# Altium PCB Sensor_Box_RGB_CTRL.PCBDOC (part 1 of 2)
Units mil, origin at the board's own origin, x right, y up, seen from the top; angles counter-clockwise.
Board outline 895.86 x 2876.17 mil, 2 copper layers (Top, Bot), stack 61.855 mil thick; 64 components, 53 nets, 223 pads, 84 vias.
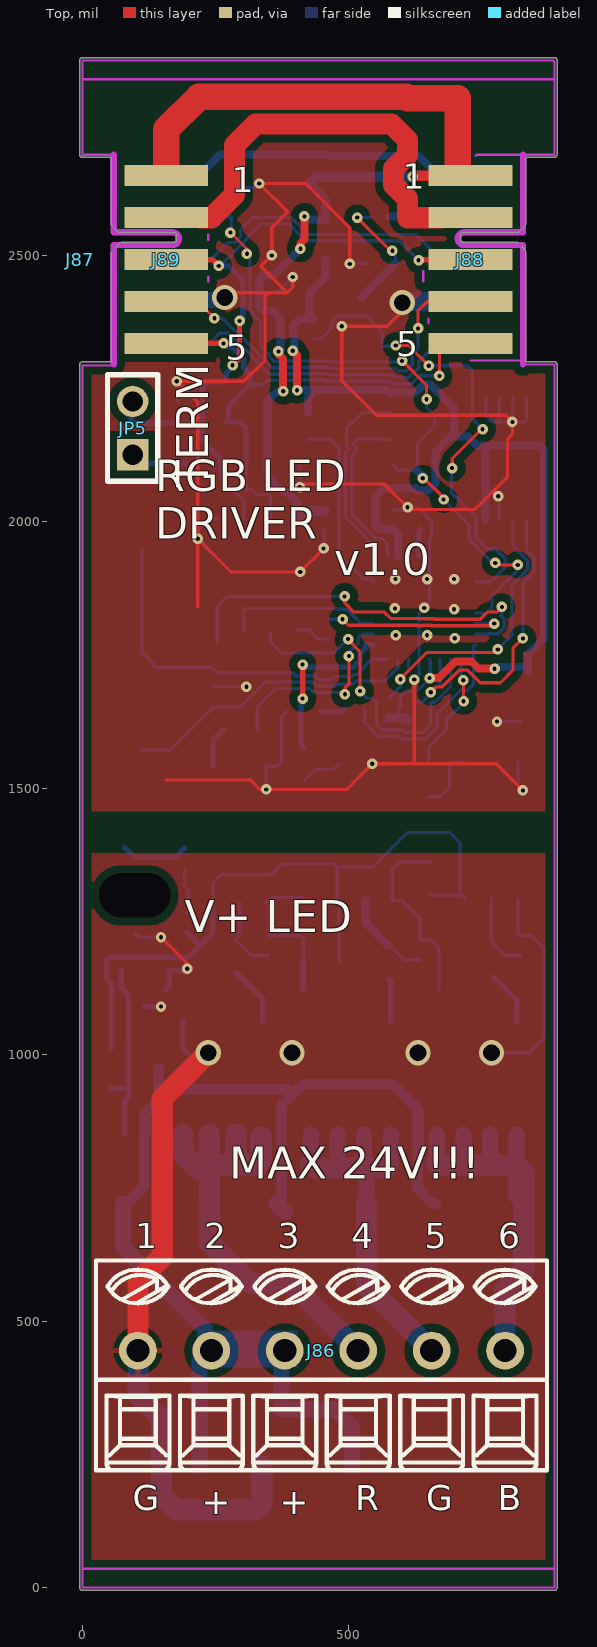
[diagram p0: Top view]
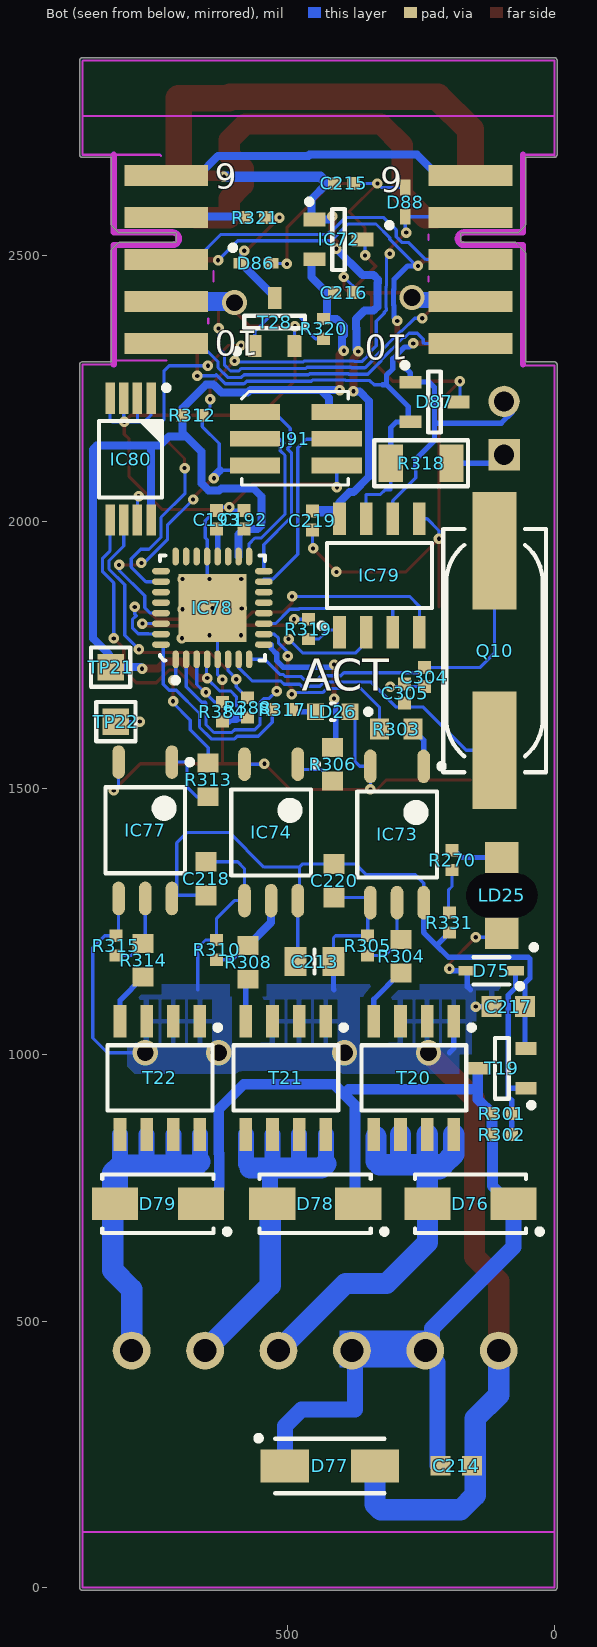
[diagram p1: Bot view, seen from below]
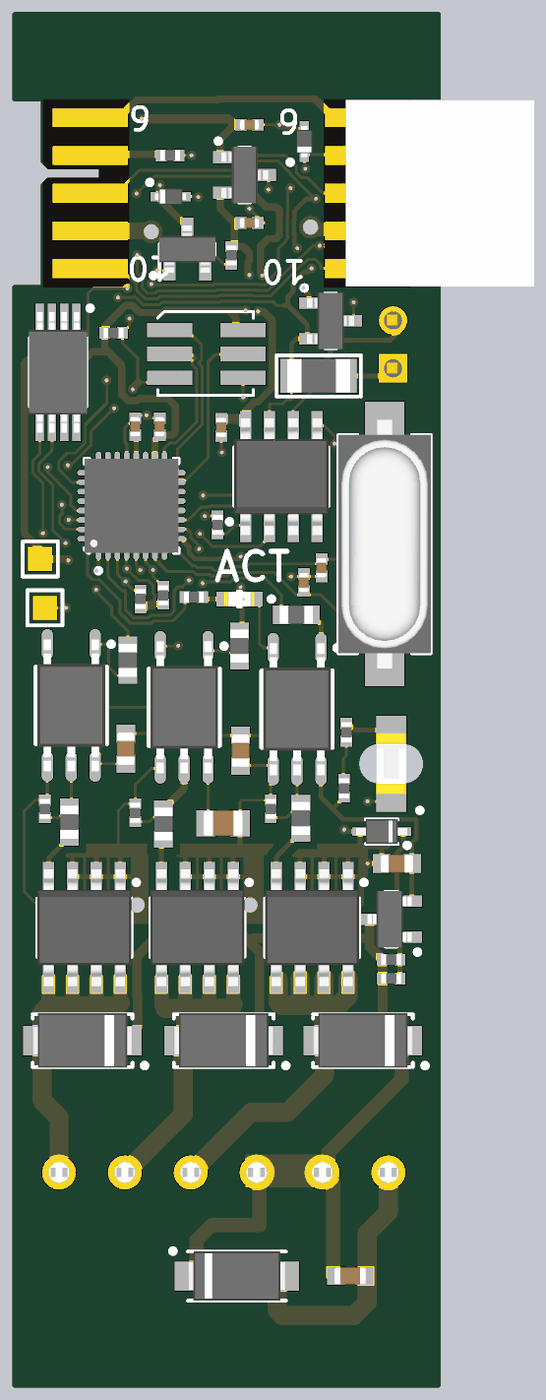
[diagram p2: 3D render of the assembled board from below, using the file's embedded part models]

## Layer stack, top to bottom
TopSolder: solder mask 0.4, Solder Resist, Dk 3.5
Top: signal copper 1.4
Dielectric1: core 59.0551, FR-4, Dk 4.8
Bot: signal copper 1.4
BottomSolder: solder mask 0.4, Solder Resist, Dk 3.5

## Board outline
-5.02,0 -5.02,2295.28 cw(c0,2295.28) 0,2300.29 54.04,2300.29 54.04,2503.94 cw(c59.06,2503.94) 55.53,2507.5 55.51,2507.48 71.26,2523.23 71.24,2523.21 cw(c74.8,2519.68) 74.8,2524.7 176.09,2524.7 176.09,2542.23 70.87,2542.23 cw(c70.87,2547.24) 67.3,2543.71 67.32,2543.7 55.51,2555.51 55.53,2555.49 cw(c59.06,2559.06) 54.04,2559.06 54.04,2683.96 0,2683.96 cw(c0,2688.98) -5.02,2688.98 -5.02,2866.14 ccw(c0,2866.14) -5.02,2866.14 cw(c0,2866.14) 0,2871.16 885.83,2871.16 cw(c885.83,2866.14) 890.84,2866.14 890.84,2688.98 cw(c885.83,2688.98) 885.83,2683.96 831.79,2683.96 831.79,2559.06 cw(c826.77,2559.06) 830.3,2555.49 830.32,2555.51 818.51,2543.7 818.52,2543.72 cw(c814.96,2547.24) 814.96,2542.23 709.74,2542.23 709.74,2524.7 814.96,2524.7 cw(c814.96,2519.69) 818.52,2523.21 818.51,2523.23 830.32,2511.42 830.3,2511.44 cw(c826.77,2507.87) 831.79,2507.87 831.79,2300.29 885.83,2300.29 cw(c885.83,2295.28) 890.84,2295.28 890.84,0 cw(c885.83,0) 885.83,-5.01 0.04,-5.01 cw(c0,0)

## Design rules (kind name [scope] priority, off if disabled: settings)
Clearance Clearance_DIFF [(InDifferentialPairClass('All Differential Pairs'))] p1: gap=5 ignorepadtopadclearanceinfootprint=FALSE except(0: Arc-Hole Track-Hole SMDPad-Hole THPad-Hole Via-Hole Fill-Hole Poly-Hole Region-Hole Text-Hole; 10: Arc-Poly Track-Poly SMDPad-Poly THPad-Poly Via-Poly Fill-Poly Poly-Poly Poly-Region Poly-Text)
Clearance [All] p2: gap=6 ignorepadtopadclearanceinfootprint=FALSE except(15: Arc-Poly Track-Poly SMDPad-Poly THPad-Poly Via-Poly Fill-Poly Poly-Poly)
DiffPairsRouting [All] p1: maxlimit=10 minlimit=5 mostfreqgap=5 toplayer_minwidth=5 toplayer_maxwidth=15 toplayer_prefwidth=10 bottomlayer_minwidth=5 bottomlayer_maxwidth=15 bottomlayer_prefwidth=10 maxuncoupledlength=500
FabricationTestPointUsage TestPointUsage [All] p1: valid=0 allowmultiple=FALSE
FabricationTestpoint Testpoint [All] p1: side=3 testpointundercomponent=TRUE minsize=40 maxsize=100 preferedsize=60 minholesize=20 maxholesize=40 preferedholesize=32 testpointgrid=1 allowsidetop=TRUE allowsidebottom=TRUE usegrid=TRUE gridtolerance=0.01
HoleSize [All] p1: absolutevalues=TRUE maxlimit=150 minlimit=1 maxpercent=80.000 minpercent=20.000
HoleToHoleClearance [All] p1: gap=1 allowstackedmicrovias=TRUE
MinimumSolderMaskSliver [All] p1: minsoldermaskwidth=0
PlaneClearance [All] p1: clearance=10
PlaneConnect [All] p1: planeconnectstyle=Direct reliefexpansion=20 reliefentries=4 reliefconductorwidth=10 reliefairgap=10
PolygonConnect PolygonConnect_pad [(InPadClass('All Pads'))] p1: connectstyle=Relief reliefconductorwidth=10 reliefentries=4 polygonreliefangle="90 Angle" airgapwidth=10
PolygonConnect [All] p2: connectstyle=Direct reliefconductorwidth=10 reliefentries=4 polygonreliefangle="45 Angle" airgapwidth=10
RoomDefinition Sensor_Box_RGB_CTRL [InComponentClass('Sensor_Box_RGB_CTRL')] p1 off: confinementstyle=ConfineIn formatcopy=TRUE lockcomponents=FALSE outline 793.29,1049.2 7988.16,1049.2 7988.16,1984.24 793.29,1984.24
RoutingVias [All] p1: holewidth=7.87 width=19.68 viastyle="Through Hole" minholewidth=7.87 minwidth=19.68 maxholewidth=50 maxwidth=100
SilkToSilkClearance [All] p1: silktosilkclearance=0
SilkToSolderMaskClearance SilkscreenOverComponentPads [IsPad] p1: minsilkscreentomaskgap=0 clearancetoexposedcopper=TRUE
SolderMaskExpansion [All] p1: expansion=2
Width [All] p1: maxlimit=50 minlimit=5 preferedwidth=5
20 further rules are at their usual default settings.

## Components (designator, comment, footprint, x,y, rotation, side; value= is the part's Value field where it differs from the comment)
C192 "100nF" CAPC1005X55N 582.68,2003.94 r270 bottom
C193 "1uF" CAPC1005X55N 633.86,2003.94 r90 bottom
C213 "10uF" CAPC2012X135N 450,1175 r0 bottom
C214 "4.7uF" CAPC1608X90N 184.12,228.85 r0 bottom
C215 "1uF" CAPC1005X55N 395,2635 r0 bottom
C216 "1uF" CAPC1005X55N 395,2430 r0 bottom
C217 "100nF" CAPC1608X87N 86.61,1090.55 r0 bottom
C218 "100nF" CAPC1608X87N 653.54,1330.71 r90 bottom
C219 "100nF" CAPC1005X55N 454.06,2002.42 r270 bottom
C220 "100nF" CAPC1608X87N 413.39,1326.77 r270 bottom
C304 "18pF" CAPC1005X55N 244.09,1708.87 r90 bottom
C305 "18pF" CAPC1005X55N 281.14,1678.09 r270 bottom
D75 "MM3Z12VB" SODFL2513X100N 118.11,1157.48 r0 bottom
D76 "SS16" DIOM5127X229N 157.48,720.47 r0 bottom
D77 "SMAJ24A" DIOM5226X262N 421.26,228.35 r180 bottom
D78 "SS16" DIOM5127X229N 448.82,720.47 r0 bottom
D79 "SS16" DIOM5127X229N 744.09,720.47 r0 bottom
D86 "PESD3V3S1UB" SODFL1608X65N 560,2485 r180 bottom
D87 "SM712" SOT95P237X112-3N 225,2225 r180 bottom
D88 "PESD3V3S1UB" SODFL1608X65N 280,2600 r90 bottom
IC72 "AP7313-33SAG-7" SOT95P240X130-3N 405,2530 r180 bottom
IC73 "TLP152(E)" SOIC127P700X210-5N 295.28,1413.39 r270 bottom
IC74 "TLP152(E)" SOIC127P700X210-5N 531.5,1417.32 r270 bottom
IC77 "TLP152(E)" SOIC127P700X210-5N 767.72,1421.26 r270 bottom
IC78 "ATMEGA328PB-MU" QFN50P500X500X100-33N-S325 641.73,1838.58 r90 bottom
IC79 "ST485ECDR" SOIC127P600X175-8N 328.23,1899.61 r90 bottom
IC80 "M24256-BRDW6" SOP65P640X120-8N 795.28,2117.72 r270 bottom
J86 "=Family" PHOENIX_1751138 448.82,444.88 r0 top
J87 "=Family" "AVX_00 9159 010 061 916" -3.94,2492.13 r180 top
J88 "=Family" EDGE10T5B10_P200W1000L0F100X400 728.35,2334.65 r90 top
J89 "=Family" EDGE10T1B6_P200W1000L0F100X400 157.48,2649.61 r270 top
J91 "ZL322-2X3P or PLHTD6S-TR-CV" ZL322-2X3P 485,2156 r270 bottom
JP5 "1798942 (goldpin 2x 2.54)" jump 94.49,2125.98 r180 top
LD25 "Green" LED_KINGBRIGHT_KPTR3216 98.43,1299.21 r270 bottom
LD26 "Green" LED_KINGBRIGHT_KPH-1608CGCK 416,1643.7 r0 bottom
Q10 "8.192MHz" XTAL_ABRACON_ABLS 112.2,1758.54 r270 bottom
R270 "10k" RESC1005X40N 192.07,1365.16 r270 bottom
R301 "10k" RESC1005X40N 98.43,889.76 r180 bottom
R302 "10k" RESC1005X40N 98.43,850.39 r180 bottom
R303 "150" RESC1608X55N 296.84,1610.9 r180 bottom
R304 "30" RESC1608X55N 287.4,1185.04 r270 bottom
R305 "10k" RESC1005X40N 350.39,1204.72 r270 bottom
R306 "150" RESC1608X55N 416,1545.28 r270 bottom
R308 "30" RESC1608X55N 574.8,1173.23 r270 bottom
R310 "10k" RESC1005X40N 633.86,1196.85 r270 bottom
R312 "10k" RESC1005X40N 679.13,2200 r180 bottom
R313 "150" RESC1608X55N 649.61,1515.75 r270 bottom
R314 "30" RESC1608X55N 771.65,1177.17 r270 bottom
R315 "10k" RESC1005X40N 822.83,1204.72 r270 bottom
R317 "10k" RESC1005X40N 510.96,1647.64 r180 bottom
R318 "120R" 1206R 250,2110 r180 bottom
R319 "1k" RESC1005X40N 461.81,1798.7 r270 bottom
R320 "100k" RESC1005X40N 433.07,2362.2 r90 bottom
R321 "49R9" RESC1005X40N 561,2571 r180 bottom
R331 "10k" RESC1005X40N 196.85,1248.03 r270 bottom
R384 "10k" RESC1005X40N 623,1643.7 r90 bottom
R388 "10k" RESC1005X40N 575.42,1651.57 r90 bottom
T19 "BC817-25" SOT95P230X110-3N 98.43,974.41 r0 bottom
T20 "IRF8721PBF" SOIC127P600X175-8N 263.78,956.69 r270 bottom
T21 "IRF8721PBF" SOIC127P600X175-8N 503.94,956.69 r270 bottom
T22 "IRF8721PBF" SOIC127P600X175-8N 740.16,956.69 r270 bottom
T28 "BSS138LT1G" SOT95P240X110-3N 525,2375 r90 bottom
TP21 "Test Point" TPS127 832.68,1727.46 r90 bottom
TP22 "Test Point" TPS127 822.84,1625.2 r90 bottom

## Footprints (in the part's own frame and the unit in brackets; to place one, negate y for a bottom-side part, rotate by r counter-clockwise, add the part's x,y. Pads: shape width x height; smd on the part's side, far side on the other; paste and mask are expansions set on the pad)
1206R [mm]
  rect 1.15x1.8 smd: 1(-1.45,0) 2(1.45,0)
  silkscreen extent -2.24,-1.09 2.24,1.09, body extent -1.67,-0.87 1.68,0.88, height 0.65
"AVX_00 9159 010 061 916" [mil] "10 Contacts, 2mm Pitch, Open Ended Card Edge Connector, 9159 Series"
  body extent -197,-195 197,195, height 67
CAPC1005X55N [mm] "Chip Capacitor, Body 1.0x0.55mm, IPC Medium Density"
  rect 0.62x0.62 smd: 1(-0.45,0) 2(0.45,0)
  body extent -0.52,-0.27 0.53,0.28, height 0.55
CAPC1608X87N [mm] "Chip Capacitor, Body 1.6x0.8mm IPC Medium Density"
  rect 0.95x1 smd: 1(-0.8,0) 2(0.8,0)
  body extent -0.87,-0.47 0.88,0.48, height 0.87
CAPC1608X90N [mm] "Chip Capacitor, Body 1.6x0.8mm IPC Medium Density"
  rect 0.95x0.95 smd: 1(-0.75,0) 2(0.75,0)
  body extent -0.85,-0.45 0.85,0.45, height 0.9
CAPC2012X135N [mm] "Chip Capacitor, Body 2.0x1.25mm, IPC Medium Density"
  rect 1.05x1.4 smd: 1(-0.9,0) 2(0.9,0)
  silkscreen extent 0,-0.58 0,0.58, body extent -1.05,-0.67 1.05,0.68, height 1.25
DIOM5127X229N [mm] "DO-214-AC/SMA Molded Diode, 2-Leads, Body 5.1x2.7mm, IPC Medium Density"
  rect 2.2x1.55 smd: 1(-2.05,0) 2(2.05,0)
  silkscreen extent -3.42,-1.4 2.65,1.45, body extent -2.67,-1.45 2.68,1.45, height 2.29
DIOM5226X262N [mm] "DO-214-AC/SMA Diode, Molded Body; 5.21mm L X 2.605mm W X 2.62mm H, IPC Medium Density"
  rect 2.3x1.55 smd: 1(-2.15,0) 2(2.15,0)
  silkscreen extent -3.53,-1.3 2.6,1.45, body extent -2.6,-1.3 2.6,1.31, height 2.62
EDGE10T1B6_P200W1000L0F100X400 [mm] "10 contacts Board Edge Connector, First Left Top Pad 1, First Left Bottom Pad 2, Pitch 2mm, Length 0mm, Width 10mm, Finger Lenght 4mm, Finger Width 1mm"
  rect 1x4 smd paste-0.5: 1(0,0) 2(2,0) 3(4,0) 4(6,0) 5(8,0)
  rect 1x4 smd far side paste-0.5: 6(0,0) 7(2,0) 8(4,0) 9(6,0) 10(8,0)
  KeepOutLayer lines w0.3: 9,-2.5 3.3,-2.5 3.3,0.3 ccw(c3,0.3) 2.7,0.3 2.7,-2.5 -1,-2.5
EDGE10T5B10_P200W1000L0F100X400 [mm] "10 contacts Board Edge Connector, First Left Top Pad 5, First Left Bottom Pad 10, Pitch 2mm, Length 0mm, Width 10mm, Finger Lenght 4mm, Finger Width 1mm"
  rect 1x4 smd paste-0.5: 1(8,0) 2(6,0) 3(4,0) 4(2,0) 5(0,0)
  rect 1x4 smd far side paste-0.5: 6(8,0) 7(6,0) 8(4,0) 9(2,0) 10(0,0)
  KeepOutLayer lines w0.3: -1,-2.5 4.7,-2.5 4.7,0.3 cw(c5,0.3) 5.3,0.3 5.3,-2.5 9,-2.5
jump [mm]
  rect 1.5x1.5 hole 0.965: 1(0,0)
  round 1.5 hole 0.965: 2(0,-2.54)
  silkscreen extent -1.2,-3.81 1.2,1.27, body extent -1.26,-3.84 1.19,1.24, height 8
LED_KINGBRIGHT_KPH-1608CGCK [mm] "SMT Green LED, Case 0603, Body L 1.6 x W 0.8mm H 0.65mm"
  rect 0.8x0.8 smd: 1(-0.825,0) 2(0.825,0)
  silkscreen extent -1.82,-0.4 0.08,0.4, body extent -0.8,-0.4 0.8,0.4, height 0.65
LED_KINGBRIGHT_KPTR3216 [mm] "Reverse Mount LED 3216, Hole 2.1x2.3mm 0.35mm Height"
  rect 1.5x1.6 smd: 1(1.8,0) 2(-1.8,0)
  oval 1.9x3.2 hole 2.1 slot 3.4 at 90 deg unplated mask+0.1: 3(0,0)
  silkscreen extent 2.35,1.4 2.6,1.65, body extent -1.6,-0.8 1.6,0.8, height 0.25
PHOENIX_1751138 [mm] "PC Terminal Block, Pitch 3.5mm, 6 Positions, Screw Connection"
  round 1.8 hole 1.1: 1(-8.75,0) 2(-5.25,0) 3(-1.75,0) 4(1.75,0) 5(5.25,0) 6(8.75,0)
  silkscreen extent -10.75,-5.7 10.75,4.3, body extent -10.75,-5.7 10.75,4.3, height 9.5
QFN50P500X500X100-33N-S325 [mm] "QFN, (MO-220-VHHD-4) 0.50mm pitch,square; 8 pin X 8 pin, 5mm X 5mm X 1.00mm H body (w/thermal tab 3.25 X 3.25mm),  IPC Medium Density"
  oval 0.85x0.3 smd: 1(-2.45,1.75) 2(-2.45,1.25) 3(-2.45,0.75) 4(-2.45,0.25) 5(-2.45,-0.25) 6(-2.45,-0.75) 7(-2.45,-1.25) 8(-2.45,-1.75) 17(2.45,-1.75) 18(2.45,-1.25) 19(2.45,-0.75) 20(2.45,-0.25) 21(2.45,0.25) 22(2.45,0.75) 23(2.45,1.25) 24(2.45,1.75)
  oval 0.3x0.85 smd: 9(-1.75,-2.45) 10(-1.25,-2.45) 11(-0.75,-2.45) 12(-0.25,-2.45) 13(0.25,-2.45) 14(0.75,-2.45) 15(1.25,-2.45) 16(1.75,-2.45) 25(1.75,2.45) 26(1.25,2.45) 27(0.75,2.45) 28(0.25,2.45) 29(-0.25,2.45) 30(-0.75,2.45) 31(-1.25,2.45) 32(-1.75,2.45)
  rect 3.25x3.25 smd: 33(0,0)
  silkscreen extent -3.57,-2.5 2.5,2.5, body extent -2.5,-2.5 2.5,2.5, height 1
RESC1005X40N [mm] "Chip Resistor, EIA 0402, Metric 1005, Body 1.0x0.5mm, IPC Medium Density"
  rect 0.58x0.62 smd: 1(-0.47,0) 2(0.47,0)
  body extent -0.52,-0.27 0.53,0.28, height 0.4
RESC1608X55N [mm] "Chip Resistor, EIA 0603, Metric 1608, Body 1.6x0.8mm, IPC Medium Density"
  rect 0.9x1 smd: 1(-0.8,0) 2(0.8,0)
  body extent -0.87,-0.47 0.88,0.48, height 0.55
SODFL1608X65N [mm] "Ultra Small Outline Diode Flat Lead (SOD-523), Body; 1.2mm L X 0.8mm W X 0.65mm H, IPC Medium Density"
  rect 0.75x0.5 smd: 1(-0.7,0) 2(0.7,0)
  silkscreen extent -1.23,0.63 -0.98,0.87, body extent -0.82,-0.42 0.83,0.43, height 0.65
SODFL2513X100N [mm] "SODFL Diode; 1.70mm W X 1.30mm L X 1.00mm H body, IPC Medium Density"
  rect 0.82x0.46 smd: 1(-1.15,0) 2(1.15,0)
  silkscreen extent -1.47,-0.65 0.85,0.85, body extent -1.35,-0.65 1.35,0.65, height 1
SOIC127P600X175-8N [mm] "SOIC 8, Pitch 1.27mm - Body 4x5mm, IPC Medium Density"
  rect 1.55x0.6 smd: 1(-2.7,1.905) 2(-2.7,0.635) 3(-2.7,-0.635) 4(-2.7,-1.905) 5(2.7,-1.905) 6(2.7,-0.635) 7(2.7,0.635) 8(2.7,1.905)
  silkscreen extent -2.52,-2.5 1.55,2.88, body extent -3.1,-2.5 3.1,2.5, height 1.75
SOIC127P700X210-5N [mm] "SOIC, 5-Leads, Body 3.70x4.55mm, Pitch 1.27mm, IPC Medium Density"
  oval 1.6x0.6 smd: 1(-3.25,1.27) 3(-3.25,-1.27) 4(3.25,-1.27) 5(3.25,0) 6(3.25,1.27)
  silkscreen extent -3.37,-1.9 2.05,2.24, body extent -3.5,-1.8 3.5,1.8, height 2.5
SOP65P640X120-8N [mm] "SOP, 0.65mm pitch; 8 pin, 4.40mm W X 3.00mm L X 1.20mm H body, IPC Medium Density"
  rect 1.5x0.45 smd: 1(-2.9,0.975) 2(-2.9,0.325) 3(-2.9,-0.325) 4(-2.9,-0.975) 5(2.9,-0.975) 6(2.9,-0.325) 7(2.9,0.325) 8(2.9,0.975)
  silkscreen extent -3.52,-1.5 1.83,1.82, body extent -3.2,-1.55 3.2,1.55, height 1.2
SOT95P230X110-3N [mm] "SOT23, 3 pin, Pitch 0.95mm - 1.3mm W X 2.9mm L X 1.1mm H, IPC Medium Density"
  rect 1x0.6 smd: 1(-1.15,0.95) 2(-1.15,-0.95) 3(1.15,0)
  silkscreen extent -1.52,-1.45 0.33,1.87, body extent -1.08,-1.5 1.25,1.5, height 1.1
SOT95P237X112-3N [mm] "SOT, 0.95mm, pitch; 3 pin,1.30mm W X 2.92mm L X 1.12mm H body, IPC Medium Density"
  rect 1.05x0.6 smd: 1(-1.15,0.95) 2(-1.15,-0.95) 3(1.15,0)
  silkscreen extent -1.53,-1.45 0.3,1.87, body extent -1.25,-1.5 1.25,1.5, height 1.1
SOT95P240X110-3N [mm] "SOT23 3-Leads, Pitch 0.95mm, Body 1.3x2.9mm, IPC Medium Density"
  rect 1.05x0.65 smd: 1(-1.15,0.95) 2(-1.15,-0.95) 3(1.15,0)
  silkscreen extent -1.52,-1.45 0.3,1.92, body extent -1.25,-1.5 1.25,1.5, height 1.1
SOT95P240X130-3N [mm] "SOT23 3-Leads, Pitch 0.95mm - Body 1.3x2.9mm, IPC Medium Density"
  rect 1.05x0.65 smd: 1(-1.15,0.95) 2(-1.15,-0.95) 3(1.15,0)
  silkscreen extent -1.53,-1.45 0.3,1.92, body extent -1.25,-1.5 1.25,1.5, height 1.3
TPS127 [mil] "1.27 x  1.27mm SMD Test Point Area"
  rect 50x50 smd paste-50: 1(0,0)
  silkscreen extent -37,-37 37,37
XTAL_ABRACON_ABLS [mm] "HC/49US (AT49) SMD Cristal, Body 11.4x4.7mm, ABLS Serie"
  rect 5.6x2.1 smd: 1(-4.75,0) 2(4.75,0)
  silkscreen extent -5.8,-2.45 5.8,2.45, body extent -6.6,-2.45 6.6,2.45, height 4.2
ZL322-2X3P [mm] "SMT 1.27 mm dual goldpin"
  rect 0.76x2.4 smd: 1(-1.27,-1.95) 2(-1.27,1.95) 3(0,-1.95) 4(0,1.95) 5(1.27,-1.95) 6(1.27,1.95)
  silkscreen extent -2.25,-2.58 2.2,2.5, body extent -2.05,-2.15 2.03,2.15, height 4.5

## Part data
C192: library part CC0402_100NF_16V_10%_X5R, "Non-polarised capacitor", Case=0402, Manufacturer=GENERIC, Manufacturer1 ComponentHeight=0.55mm, Manufacturer1 Example=MURATA, Manufacturer1 Part Number=GRM155R61C104KA88D, Tolerance=±10%, Voltage=16V, Author="CERN DEM JLC", Component Type=Standard, CreateDate=10.12.2013, HelpURL=\\cern.ch\dfs\Applications\Altium\Datasheets\CC0402_X5R_MURATA_GRM.pdf, LatestRevisionDate=10.12.2013, Manufacturer Part Number=CC0402_100NF_16V_10%_X5R, Mounted=Yes, Part Description="SMD Multilayer Chip Ceramic Capacitor", Part Number=CC0402_100NF_16V_10%_X5R, Pin Count=2, Sense=No, SMD=Yes, Socket=No, Status=None, TC=X5R
C193 C215 C216: library part CC0402_1UF_16V_10%_X5R, "Non-polarised capacitor", Case=0402, Manufacturer=GENERIC, Manufacturer1 ComponentHeight=0.55mm, Manufacturer1 Example=TDK, Manufacturer1 Part Number=C1005X5R1C105KT, Tolerance=±10%, Voltage=16V, Author="CERN DEM JLC", Component Type=Standard, CreateDate=25.10.2012, HelpURL=\\cern.ch\dfs\Applications\Altium\Datasheets\CC0402_X5R_TDK_C.pdf, LatestRevisionDate=25.10.2012, Manufacturer Part Number=CC0402_1UF_16V_10%_X5R, Mounted=Yes, Part Description="SMD Multilayer Chip Ceramic Capacitor", Part Number=CC0402_1UF_16V_10%_X5R, Pin Count=2, Sense=No, SMD=Yes, Socket=No, Status=Preferred, TC=X5R
C213: library part CC0805_10UF_16V_10%_X5R, "Non-polarised capacitor", Case=0805, Manufacturer=GENERIC, Manufacturer1 ComponentHeight=1.4mm, Manufacturer1 Example=KEMET, Manufacturer1 Part Number=C0805C106K4PAC, Tolerance=±10%, Voltage=16V, Author="CERN DEM JLC", Component Type=Standard, CreateDate=03.12.2007, HelpURL=\\cern.ch\dfs\Applications\Altium\Datasheets\CC1206_X5R_KEMET.pdf, LatestRevisionDate=03.12.2007, Manufacturer Part Number=CC0805_10UF_16V_10%_X5R, Mounted=Yes, Part Description="SMD Multilayer Chip Ceramic Capacitor", Part Number=CC0805_10UF_16V_10%_X5R, Pin Count=2, Sense=No, SMD=Yes, Socket=No, Status=Preferred, TC=X5R
C214: library part CC0603_4.7UF_25V_10%_X5R, "Non-polarised capacitor", Case=0603, Manufacturer=GENERIC, Manufacturer1 ComponentHeight=0.95mm, Manufacturer1 Example=MURATA, Manufacturer1 Part Number=GRM188R61E475KE11D, Tolerance=±10%, Voltage=25V, Author="CERN DEM JLC", Component Type=Standard, CreateDate=10.11.2014, HelpURL=\\cern.ch\dfs\Applications\Altium\Datasheets\CC0603_MURATA_GRM188R61E475KE11D.pdf, LatestRevisionDate=10.11.2014, Manufacturer Part Number=CC0603_4.7UF_25V_10%_X5R, Mounted=Yes, Part Description="SMD Multilayer Chip Ceramic Capacitor", Part Number=CC0603_4.7UF_25V_10%_X5R, Pin Count=2, Sense=No, SMD=Yes, Socket=No, Status=None, TC=X5R
C217 C218 C220: library part CC0603_100NF_50V_10%_X5R, "Non-polarised capacitor", Case=0603, Manufacturer=GENERIC, Manufacturer1 ComponentHeight=0.9mm, Manufacturer1 Example=TDK, Manufacturer1 Part Number=C1608X5R1H104K080AA, Tolerance=±10%, Voltage=50V, Author="CERN DEM MR", Component Type=Standard, CreateDate=08.01.2016, HelpURL=\\cern.ch\dfs\Applications\Altium\Datasheets\CC0603_X5R_TDK_C.pdf, LatestRevisionDate=08.01.2016, Manufacturer Part Number=CC0603_100NF_50V_10%_X5R, Mounted=Yes, Part Description="SMD Multilayer Chip Ceramic Capacitor", Part Number=CC0603_100NF_50V_10%_X5R, Pin Count=2, Sense=No, SMD=Yes, Socket=No, Status=None, TC=X5R
C219: library part CC0402_100NF_16V_10%_X7R, "Non-polarised capacitor", Case=0402, Manufacturer=GENERIC, Manufacturer1 ComponentHeight=0.55mm, Manufacturer1 Example=MURATA, Manufacturer1 Part Number=GRM155R71C104KA88D, Tolerance=±10%, Voltage=16V, Author="CERN DEM JLC", Component Type=Standard, CreateDate=05.12.2013, HelpURL=\\cern.ch\dfs\Applications\Altium\Datasheets\CC0402_X7R_MURATA_GRM.pdf, LatestRevisionDate=03.12.2007, Manufacturer Part Number=CC0402_100NF_16V_10%_X7R, Mounted=Yes, Part Description="SMD Multilayer Chip Ceramic Capacitor", Part Number=CC0402_100NF_16V_10%_X7R, Pin Count=2, Sense=No, SMD=Yes, Socket=No, Status="Not Recommended", TC=X7R
C304 C305: library part CC0402_18PF_50V_5%_C0G, "Non-polarised capacitor", Case=0402, Manufacturer=GENERIC, Manufacturer1 ComponentHeight=0.55mm, Manufacturer1 Example=KEMET, Manufacturer1 Part Number=C0402C180J5GACTU, Tolerance=±5%, Voltage=50V, Author="CERN DEM JLC", Component Type=Standard, CreateDate=04.10.2016, HelpURL="\\cern.ch\dfs\Applications\Altium\Datasheets\CC0805_C0G_KEMET_(Commercial Grade).pdf", LatestRevisionDate=04.10.2016, Manufacturer Part Number=CC0402_18PF_50V_5%_C0G, Mounted=Yes, Part Description="SMD Multilayer Chip Ceramic Capacitor", Part Number=CC0402_18PF_50V_5%_C0G, Pin Count=2, Sense=No, SMD=Yes, Socket=No, Status=Preferred, TC=C0G/NP0
D75: "Zener Diode", Case=SOD-323F, Manufacturer="ON SEMICONDUCTOR", Power=200mW, Voltage=12V, Author="CERN DEM MR", Bonding=No, ComponentHeight=1mm, Component Type=Standard, CreateDate=19.02.2018, Device=MM3Z12VB, HelpURL=\\cern.ch\dfs\Applications\Altium\Datasheets\MM3Z12VB.pdf, LatestRevisionDate=19.02.2018, Manufacturer Part Number=MM3Z12VB, Mounted=Yes, PackageDescription="SODFL Diode (SOD-323F), 1.70mm W X 1.30mm L X 1.00mm H body, IPC Medium Density", Part Description="Zener Voltage Regulator", Part Number=MM3Z12VB, Pin Count=2, PressFit=No, Sense=No, SMD=Yes, Socket=No
D76 D78 D79: "Schottky Diode", Case=DO-214AC, Manufacturer="VISHAY GENERAL SEMICONDUCTOR", Power=1A, Voltage=60V, Author="CERN DEM JLC", Bonding=No, ComponentHeight=2.29mm, Component Type=Standard, CreateDate=15.07.2008, Device=SS16, HelpURL=\\cern.ch\dfs\Applications\Altium\Datasheets\SS16.pdf, LatestRevisionDate=23.08.2010, Manufacturer Part Number=SS16, Mounted=Yes, PackageDescription="DO-214-AC Molded Diode, Body 5.1x2.7mm, IPC Medium Density", Part Description="Surface Mount Schottky Barrier Rectifier", Part Number=SS16, Pin Count=2, PressFit=No, Sense=No, SMD=Yes, Socket=No
D77: "Transient Voltage Suppressor Diode (Uni-Directional)", Case=DO-214AC, Manufacturer=BOURNS, Power=400W, Voltage=24V, Author="CERN DEM JLC", Bonding=No, ComponentHeight=2.62mm, Component Type=Standard, CreateDate=27.06.2011, Device=SMAJ24A, HelpURL=\\cern.ch\dfs\Applications\Altium\Datasheets\SMAJ24A.pdf, LatestRevisionDate=27.06.2011, Manufacturer Part Number=SMAJ24A, Mounted=Yes, PackageDescription="DO-214-AC/SMA Diode, Molded Body; 5.21mm L X 2.605mm W X 2.62mm H, IPC Medium Density", Part Description="Surface Mount Uni-directional Transient Voltage Suppressor Diode", Part Number=SMAJ24A, Pin Count=2, PressFit=No, Sense=No, SMD=Yes, Socket=No
D86 D88: "ESD protection diode", Case=SOD523, Manufacturer="NXP SEMICONDUCTORS", Power=330W, Voltage=3V3, Author="CERN DEM JLC", Bonding=No, ComponentHeight=0.65mm, Component Type=Standard, CreateDate=29.11.2012, Device=PESD3V3S1UB, HelpURL=\\cern.ch\dfs\Applications\Altium\Datasheets\PESD3V3S1UB.pdf, LatestRevisionDate=29.11.2012, Manufacturer Part Number=PESD3V3S1UB, Mounted=Yes, PackageDescription="Ultra Small Outline Diode Flat Lead (SOD-523), Body; 1.2mm L X 0.8mm W X 0.65mm H, IPC Medium Density", Part Description="ESD protection diode (23kV)", Part Number=PESD3V3S1UB, Pin Count=2, PressFit=No, Sense=No, SMD=Yes, Socket=No
D87: "Asymmetrical TVS Diode for Extended Common-Mode RS-485", Case=SOT-23, Manufacturer=SEMTECH, Power=400W, Voltage=12V/-7V, Author="CERN DEM JLC", Bonding=No, ComponentHeight=1.12mm, Component Type=Standard, CreateDate=23.04.2012, Device=SM712, HelpURL=\\cern.ch\dfs\Applications\Altium\Datasheets\SM712.pdf, LatestRevisionDate=23.04.2012, Manufacturer Part Number=SM712, Mounted=Yes, PackageDescription="SOT, 0.95mm, pitch; 3 pin,1.30mm W X 2.92mm L X 1.12mm H body, IPC Medium Density", Part Description="Asymmetrical TVS Diode for Extended Common-Mode RS-485", Part Number=SM712, Pin Count=3, PressFit=No, Sense=No, SMD=Yes, Socket=No, Status=Obsolete
IC72: "3-Terminal Regulator 1=IN 2=OUT 3=GND", Case=SOT23, Manufacturer="DIODES INCORPORATED", Author="CERN DEM JLC", Bonding=No, ComponentHeight=1.35mm, Component Type=Standard, CreateDate=20.03.2018, Device=AP7313-33SAG-7, HelpURL=\\cern.ch\dfs\Applications\Altium\Datasheets\AP7313-33SAG-7.pdf, LatestRevisionDate=20.03.2018, Manufacturer Part Number=AP7313-33SAG-7, Mounted=Yes, PackageDescription="SOT23 3-Leads, Pitch 0.95mm - Body 1.3x2.9mm, IPC Medium Density", Part Description="3.3V, 150mA Low Quiescent Current, Fast Transient Low Dropout Linear Regulator", Part Number=AP7313-33SAG-7, Pin Count=3, PressFit=No, Sense=No, SMD=Yes, Socket=No
IC73 IC74 IC77: "Optocoupler", Case=SOIC5, Manufacturer=Toschiba, Author=GK, Bonding=No, ComponentHeight=5.08mm, Component Type=Standard, CreateDate=20.10.2014, Device=TLP152(E), HelpURL=\\cern.ch\dfs\Applications\Altium\Datasheets\FOD3182SDV.pdf, LatestRevisionDate=20.10.2014, Manufacturer Part Number=TLP152(E), Mounted=Yes, PackageDescription="SOIC, 5-Leads, Body 3.70x4.55mm, Pitch 1.27mm, IPC Medium Density", Part Description="2.5A Output Current, High Speed MOSFET Gate Driver Optocoupler", Part Number=TLP152(E), Pin Count=5, PressFit=No, Sense=No, SMD=Yes, Socket=No
IC78: "8-bit AVR 20MHz Microcontroller With 32K Bytes In-System  Programmable  Flash", Case=QFN32, Manufacturer=ATMEL, Author=GK, Bonding=No, ComponentHeight=1mm, Component Type=Standard, CreateDate=2011-02-08, Device=ATMEGA328PB-MU, HelpURL=\\cern.ch\dfs\Applications\Altium\Datasheets\ATMEGA328P-MU.pdf, LatestRevisionDate=2014-07-02, Manufacturer Part Number=ATMEGA328PB-MU, Mounted=Yes, PackageDescription="QFN, (MO-220-VHHD-2) 0.50mm pitch,square; 8 pin X 8 pin, 5mm X 5mm X 1.00mm H body (w/thermal tab 3.25 X 3.25mm),  IPC Medium Density", Part Description="8-bit AVR Microcontroller, 32KB Flash, 1KB EEPROM, 2KB SRAM, 32-pin MLF, Industrial Grade (-40°C to 85°C)", Part Number=ATMEGA328PB-MU, Pin Count=33, PressFit=No, Sense=No, SMD=Yes, Socket=No
IC79: "±15kV ESD-Protected, Low Power  RS-485/RS-422 Transceiver", Case=SOIC8, Manufacturer="ST MICROELECTRONICS", Author="CERN DEM MR", Bonding=No, ComponentHeight=1.75mm, Component Type=Standard, CreateDate=15.02.2018, Device=ST485ECDR, HelpURL=\\cern.ch\dfs\Applications\Altium\Datasheets\ST485ECDR.pdf, LatestRevisionDate=15.02.2018, Manufacturer Part Number=ST485ECDR, Mounted=Yes, PackageDescription="SOIC 8, Pitch 1.27mm - Body 4x5mm, IPC Medium Density", Part Description="±15kV ESD-Protected, Low Power  RS-485/RS-422 Transceiver", Part Number=ST485ECDR, Pin Count=8, PressFit=No, Sense=No, SMD=Yes, Socket=No
IC80: "256-Kbit Serial I²C Bus EEPROM", Case=TSSOP8, Manufacturer="ST MICROELECTRONICS", Part Number=M24256-BRDW6P, Author="CERN DEM MR", Bonding=No, ComponentHeight=1.2mm, Component Type=Standard, CreateDate=17.03.2016, Device=M24256-BRDW6, HelpURL=\\cern.ch\dfs\Applications\Altium\Datasheets\M24256-BRDW6P.pdf, LatestRevisionDate=17.03.2016, Manufacturer Part Number=M24256-BRDW6, Mounted=Yes, PackageDescription="SOP, 0.65mm pitch; 8 pin, 4.40mm W X 3.00mm L X 1.20mm H body, IPC Medium Density", Part Description="256-Kbit Serial I²C Bus EEPROM", Pin Count=8, PressFit=No, Sense=No, SMD=Yes, Socket=No
J86: library part PHOENIX_1751138, "Terminal Block, 6 Positions, Screw Connection", Manufacturer="PHOENIX CONTACT", Manufacturer Part Number="1751138 (SMKDS 1/ 6-3,5)", Author="CERN DEM JLC", ComponentHeight=9.5mm, Component Type=Standard, CreateDate=31.03.2015, HelpURL=\\cern.ch\dfs\Applications\Altium\Datasheets\PHOENIX_1751138.pdf, LatestRevisionDate=31.03.2015, Mounted=Yes, Part Description="10A 200V PCB Terminal Block, Pitch 3.5mm, 6 Positions, Screw Connection (Conductor/PCB connection direction: 55°)", Part Number=PHOENIX_1751138, Pin Count=6, PressFit=No, Sense=No, SMD=No, Socket=No, Status=None
J87: library part "AVX_00 9159 010 061 916", "Open Ended Card Edge Connector, 9159 Series", Manufacturer=AVX, Manufacturer Part Number="00 9159 010 061 916", Author="CERN DEM MR", ComponentHeight=1.6mm, Component Type=Standard, CreateDate=13.02.2018, HelpURL="\\cern.ch\dfs\Applications\Altium\Datasheets\AVX_00 9159 010 061 916.pdf", LatestRevisionDate=13.02.2018, Mounted=Yes, Part Description="10 Contacts, 2mm Pitch, Open Ended Card Edge Connector, 9159 Series", Part Number="AVX_00 9159 010 061 916", Pin Count=10, PressFit=No, Sense=No, SMD=No, Socket=No, Status=None
J88: library part EDGE10T5B10_P200W1000L0F100X400, "PCB Edge Connector 10 (2x5)", Author="CERN DEM MR", ComponentHeight=0mm, Component Type="Standard (No BOM)", CreateDate=14.02.2018, HelpURL=\\cern.ch\dfs\Applications\Altium\Datasheets\EDGE10T5B10_P200W1000L0F100X400.pdf, LatestRevisionDate=14.02.2018, Mounted=No, Part Description="10 Contacts Board Edge Connector, Pitch 2mm, Length 0mm, Width 10mm, Finger Lenght 4mm, Finger Width 1mm", Part Number=EDGE10T5B10_P200W1000L0F100X400, Pin Count=10, PressFit=No, Sense=No, SMD=No, Socket=No, Status=None
J89: library part EDGE10T1B6_P200W1000L0F100X400, "PCB Edge Connector 10 (2x5)", Author="CERN DEM MR", ComponentHeight=0mm, Component Type="Standard (No BOM)", CreateDate=14.02.2018, HelpURL=\\cern.ch\dfs\Applications\Altium\Datasheets\EDGE10T1B6_P200W1000L0F100X400.pdf, LatestRevisionDate=14.02.2018, Mounted=No, Part Description="10 Contacts Board Edge Connector, Pitch 2mm, Length 0mm, Width 10mm, Finger Lenght 4mm, Finger Width 1mm", Part Number=EDGE10T1B6_P200W1000L0F100X400, Pin Count=10, PressFit=No, Sense=No, SMD=No, Socket=No, Status=None
J91: library part "CON_2x3 1.27 SMT Male", "1.27 mm dual row goldpin (Maritex)"
JP5: library part JUMPER, "Jumper", Supplier Part Number 1=1798942, Supplier 1=Farnell
LD25: library part LED_KINGBRIGHT_KPTR-3216CGCK, "LED Green 1A 2C", Manufacturer=KINGBRIGHT, Manufacturer Part Number=KPTR-3216CGCK, Author="CERN DEM MR", Bonding=No, Color=Green, ComponentHeight=0.35mm, Component Type=Standard, CreateDate=15.02.2016, HelpURL=\\cern.ch\dfs\Applications\Altium\Datasheets\LED_KINGBRIGHT_KPTR-3216CGCK.pdf, LatestRevisionDate=15.02.2016, Mounted=Yes, PackageDescription="Reverse Mount LED 3216, Hole 2.1x2.3mm 0.35mm Height", Part Description="Reverse Mount LED 1.4x1.6mm Green", Part Number=LED_KINGBRIGHT_KPTR-3216CGCK, Pin Count=2, PressFit=No, Sense=No, SMD=Yes, Socket=No
LD26: library part LED_KINGBRIGHT_KPH-1608CGCK, "LED Green 1C 2A", Manufacturer=KINGBRIGHT, Manufacturer Part Number=KPH-1608CGCK, Author="CERN DEM JLC", Bonding=No, Color=Green, ComponentHeight=0.65mm, Component Type=Standard, CreateDate=03.07.2017, HelpURL=\\cern.ch\dfs\Applications\Altium\Datasheets\LED_KINGBRIGHT_KPH-1608CGCK.pdf, LatestRevisionDate=03.07.2017, Mounted=Yes, PackageDescription="SMT Green LED, Case 0603, Body L 1.6 x W 0.8mm H 0.65mm", Part Description="SMD Green LED, Case 1.6mmX0.8mm(0603), 0.65mm Thickness", Part Number=LED_KINGBRIGHT_KPH-1608CGCK, Pin Count=2, PressFit=No, Sense=No, SMD=Yes, Socket=No
Q10: library part XTAL_8.192MHZ_ABRACON_ABLS-8.192MHZ-B2-T, "Quartz Crystal", Manufacturer=ABRACON, Manufacturer Part Number=ABLS-8.192MHZ-B2-T, Author="CERN DEM MR", Bonding=No, ComponentHeight=4.2mm, Component Type=Standard, CreateDate=15.02.2018, HelpURL=\\cern.ch\dfs\Applications\Altium\Datasheets\XTAL_ABRACON_ABLS.pdf, LatestRevisionDate=15.02.2018, Mounted=Yes, PackageDescription="SMD Crystal, Body 11.40mm L X 4.70mm W X 4.20mm H, HC/49US (AT49) ALBS Series", Part Description="Tolerance: ± 20ppm, Stability: ± 50ppm, -20°C to +70°C, 18pF, 80 Ohms ESR, Low Profile Surface Mount Microprocessor Crystal, ABLS Series", Part Number=XTAL_8.192MHZ_ABRACON_ABLS-8.192MHZ-B2-T, Pin Count=2, PressFit=No, Sense=No, SMD=Yes, Socket=No
R270 R301 R302 R305 R310 R312 R315 R317 R331 R384 R388: library part R0402_10K_1%_0.0625W_100PPM, "Resistor - 1%", Case=0402, Manufacturer=GENERIC, Manufacturer1 ComponentHeight=0.4mm, Manufacturer1 Example="YAGEO PHYCOMP", Manufacturer1 Part Number=232270671003L, Power=0.0625W, Tolerance=±1%, Author="CERN DEM JLC", Component Type=Standard, CreateDate=03.12.2007, HelpURL=\\cern.ch\dfs\Applications\Altium\Datasheets\R0402_Phycomp_RC0402.pdf, LatestRevisionDate=17.10.2012, Manufacturer Part Number=R0402_10K_1%_0.0625W_100PPM, Mounted=Yes, Part Description="General Purpose Thick Film Chip Resistor", Part Number=R0402_10K_1%_0.0625W_100PPM, Pin Count=2, PressFit=No, Sense=No, SMD=Yes, Socket=No, Status="Not Recommended", TC=±100ppm/°C
R303 R306 R313: library part R0603_150R_1%_0.1W_100PPM, "Resistor - 1%", Case=0603, Manufacturer=GENERIC, Manufacturer1 ComponentHeight=0.55mm, Manufacturer1 Example="NIC COMPONENT", Manufacturer1 Part Number=NRC06F1500TRF, Power=0.1W, Tolerance=±1%, Author="CERN DEM JLC", Component Type=Standard, CreateDate=03.12.2007, HelpURL=\\cern.ch\dfs\Applications\Altium\Datasheets\R0603_NIC_NRC.pdf, LatestRevisionDate=13.03.2008, Manufacturer Part Number=R0603_150R_1%_0.1W_100PPM, Mounted=Yes, Part Description="General Purpose Thick Film Chip Resistor", Part Number=R0603_150R_1%_0.1W_100PPM, Pin Count=2, PressFit=No, Sense=No, SMD=Yes, Socket=No, Status=Preferred, TC=±100ppm/°C
R304 R308 R314: library part R0603_30R_1%_0.1W_100PPM, "Resistor - 1%", Case=0603, Manufacturer=GENERIC, Manufacturer1 ComponentHeight=0.55mm, Manufacturer1 Example="NIC COMPONENT", Manufacturer1 Part Number=NRC06F30R0TRF, Power=0.1W, Tolerance=±1%, Author="CERN DEM JLC", Component Type=Standard, CreateDate=03.12.2007, HelpURL=\\cern.ch\dfs\Applications\Altium\Datasheets\R0603_NIC_NRC.pdf, LatestRevisionDate=13.03.2008, Manufacturer Part Number=R0603_30R_1%_0.1W_100PPM, Mounted=Yes, Part Description="General Purpose Thick Film Chip Resistor", Part Number=R0603_30R_1%_0.1W_100PPM, Pin Count=2, PressFit=No, Sense=No, SMD=Yes, Socket=No, Status=Preferred, TC=±100ppm/°C
R318: library part RES_1206, "SMD Resistor", Supplier Part Number 1=39K0871, Supplier 1=Newark
R319: library part R0402_1K_1%_0.0625W_100PPM, "Resistor - 1%", Case=0402, Manufacturer=GENERIC, Manufacturer1 ComponentHeight=0.4mm, Manufacturer1 Example="YAGEO PHYCOMP", Manufacturer1 Part Number=232270671002L, Power=0.0625W, Tolerance=±1%, Author="CERN DEM JLC", Component Type=Standard, CreateDate=03.12.2007, HelpURL=\\cern.ch\dfs\Applications\Altium\Datasheets\R0402_Phycomp_RC0402.pdf, LatestRevisionDate=17.10.2012, Manufacturer Part Number=R0402_1K_1%_0.0625W_100PPM, Mounted=Yes, Part Description="General Purpose Thick Film Chip Resistor", Part Number=R0402_1K_1%_0.0625W_100PPM, Pin Count=2, PressFit=No, Sense=No, SMD=Yes, Socket=No, Status="Not Recommended", TC=±100ppm/°C
R320: library part R0402_100K_1%_0.0625W_100PPM, "Resistor - 1%", Case=0402, Manufacturer=GENERIC, Manufacturer1 ComponentHeight=0.4mm, Manufacturer1 Example="YAGEO PHYCOMP", Manufacturer1 Part Number=232270671004L, Power=0.0625W, Tolerance=±1%, Author="CERN DEM JLC", Component Type=Standard, CreateDate=03.12.2007, HelpURL=\\cern.ch\dfs\Applications\Altium\Datasheets\R0402_Phycomp_RC0402.pdf, LatestRevisionDate=17.10.2012, Manufacturer Part Number=R0402_100K_1%_0.0625W_100PPM, Mounted=Yes, Part Description="General Purpose Thick Film Chip Resistor", Part Number=R0402_100K_1%_0.0625W_100PPM, Pin Count=2, PressFit=No, Sense=No, SMD=Yes, Socket=No, Status="Not Recommended", TC=±100ppm/°C
R321: library part R0402_49R9_1%_0.0625W_100PPM, "Resistor - 1%", Case=0402, Manufacturer=GENERIC, Manufacturer1 ComponentHeight=0.4mm, Manufacturer1 Example="YAGEO PHYCOMP", Manufacturer1 Part Number="232270674999L or RC0402FR-0749R9L", Power=0.0625W, Tolerance=±1%, Author="CERN DEM JLC", Component Type=Standard, CreateDate=2012-10-24, HelpURL=\\cern.ch\dfs\Applications\Altium\Datasheets\R0402_Phycomp_RC0402.pdf, LatestRevisionDate=2012-10-24, Manufacturer Part Number=R0402_49R9_1%_0.0625W_100PPM, Mounted=Yes, Part Description="General Purpose Thick Film Chip Resistor", Part Number=R0402_49R9_1%_0.0625W_100PPM, Pin Count=2, SMD=Yes, Socket=No, Status="Not recommended", Table="Resistors SMD", TC=±100ppm/°C
T19: "NPN Transistor", Case=SOT23-3, Manufacturer="NXP SEMICONDUCTORS", Author="CERN DEM JLC", Bonding=No, ComponentHeight=1.1mm, Component Type=Standard, CreateDate=28.10.2014, Device=BC817-25, HelpURL=\\cern.ch\dfs\Applications\Altium\Datasheets\BC817-25.pdf, LatestRevisionDate=28.10.2014, Manufacturer Part Number=BC817-25, Mounted=Yes, PackageDescription="SOT23, 3 pin, Pitch 0.95mm - 1.3mm W X 2.9mm L X 1.1mm H, IPC Medium Density", Part Description="45V 500mA NPN General-Purpose Transistor", Part Number=BC817-25, Pin Count=3, PressFit=No, Sense=No, SMD=Yes, Socket=No
T20 T21 T22: "30V 11A N-Channel HEXFET® Power MOSFET", Case=SOIC8, Manufacturer="INTERNATIONAL RECTIFIER", Author=GK, Bonding=No, ComponentHeight=1.75mm, Component Type=Standard, CreateDate=28.04.2011, Device=IRF8721PBF, HelpURL=\\cern.ch\dfs\Applications\Altium\Datasheets\IRF7413PBF.pdf, LatestRevisionDate=28.04.2011, Manufacturer Part Number=IRF8721PBF, Mounted=Yes, PackageDescription="SOIC 8, Pitch 1.27mm - Body 4x5mm, IPC Medium Density", Part Description="30V 11A N-Channel HEXFET® Power MOSFET", Part Number=IRF8721PBF, Pin Count=8, PressFit=No, Sense=No, SMD=Yes, Socket=No
T28: "N-CHANNEL MOSFET WITH DIODE", Case=SOT23-3, Manufacturer="ON SEMICONDUCTOR", Author="CERN DEM JLC", Bonding=No, ComponentHeight=1.11mm, Component Type=Standard, CreateDate=23.03.2009, Device=BSS138LT1G, HelpURL=\\cern.ch\dfs\Applications\Altium\Datasheets\BSS138LT1G.pdf, LatestRevisionDate=23.03.2009, Manufacturer Part Number=BSS138LT1G, Mounted=Yes, PackageDescription="SOT23 3-Leads, Pitch 0.95mm - Body 1.4x3mm, IPC Medium Density", Part Description="50V 200mA N-Channel Enhancement Mode Field-Effect Transistor", Part Number=BSS138LT1G, Pin Count=3, PressFit=No, Sense=No, SMD=Yes, Socket=No
TP21 TP22: library part SMD_PAD_1.27X1.27MM, Author="CERN DEM JLC", ComponentHeight=0mm, Component Type="Standard (No BOM)", CreateDate=12.01.2008, Family="Test Point", HelpURL=Undefined, LatestRevisionDate=12.01.2008, Mounted=No, PackageDescription="1.27mm x 1.27mm PCB Copper Area (SMD Test Point)", Part Description="1.27mm x 1.27mm PCB Copper Area (SMD Test Point)", Part Number=SMD_PAD_1.27X1.27MM, Pin Count=1, Sense=No, SMD=Yes, Socket=No, Status=None

## Via types
v1: diameter 19.68, hole 7.87, Top to Bot, tented both sides, 78 vias
v2: diameter 47.24, hole 31.5, Top to Bot, tented both sides, 6 vias

## Nets (pads, with @x,y where several pads share a name; then routed paths per layer and width w, separated by ;. In a path a pad name is that pad's centre, name@x,y a point inside that pad or via, vN(x,y) a via of type N, cw(c..) or ccw(c..) an arc to the next point about the centre after c; other vN are vias at no path point)
CH_B: D79.2 J86.6 T22.5 T22.6 T22.7 T22.8 | length 868.1
  Bot w30: 665.16,799.41 T22.8 ; T22.7 715.16,794.37 741.06,794.37 ; 739.88,793.19 741.06,794.37 ; T22.6 765.16,794.37 741.06,794.37 ; T22.5 815.16,792.22 815.16,734.06 D79.2@826.77,722.44
  Bot w40: 665.16,799.41 671.38,793.19 739.88,793.19 814.19,793.19 815.16,792.22 828.74,778.64 828.74,595.61 793.31,560.18 J86.6
CH_G: D78.2 J86.5 T21.5 T21.6 T21.7 T21.8 | length 789.7
  Bot w30: 428.94,795.47 T21.8 ; T21.7 478.94,792.72 484.25,787.4 ; T21.6 528.94,789.96 531.5,787.4 533.46,785.43 D78.2@533.46,720.47 ; 570.87,787.4 578.94,795.47 T21.5
  Bot w40: 428.94,795.47 437.01,787.4 484.25,787.4 531.5,787.4 570.87,787.4 ; D78.2@533.46,720.47 533.46,566.93 J86.5
CH_R: D76.2 J86.4 T20.5 T20.6 T20.7 T20.8 | length 888.6
  Bot w40: T20.8 188.78,813.19 208.07,793.9 ; T20.7 238.78,793.9 ; T20.6 288.78,793.9 ; T20.5@334.65,846.26 334.65,800.39 328.15,793.9 288.78,793.9 ; J86.4 391.73,570.87 314.96,570.87 238.19,647.64 D76.2 238.78,721.06 238.78,785.73 216.24,785.73 208.07,793.9 ; 208.07,793.9 238.78,793.9 ; 238.78,793.9 288.78,793.9
DEV_RESETn: IC78.26 R320.1 T28.1 | length 902
  Top w6: v1(588,2331) 612,2331 v1(650,2293) ; v1(694,2101) 694,2119 749,2174 v1(751,2174)
  Bot w6: R320.1 448.43,2343.7 468.16,2363.43 468.16,2374.8 479.2,2385.84 533.84,2385.84 562.4,2357.28 T28.1 586.72,2329.72 v1(588,2331) ; v1(650,2293) 722.99,2293 732.28,2283.7 732.28,2192.72 v1(751,2174) ; v1(694,2101) 693,2100 693,2053.65 738.19,2008.46 738.19,1971.13 760.67,1948.65 776,1948.65 793.84,1930.8 793.84,1915.2 766.44,1887.8 IC78.26
GND: C192.1 C193.2 C215.1 C216.1 C219.2 C304.1 C305.1 D86.2 D87.3 D88.2 IC72.3 IC73.3 IC74.3 IC77.3 IC78.5 IC78.21 IC78.33 IC79.5 IC80.1 IC80.2 IC80.3 IC80.4 IC80.7 J88.9 J89.9 J91.6 LD26.1 T28.2 TP22.1 | length 5456
  Top w6: 157.48,1515.75 314.96,1515.75 332.83,1497.88 v1(345.28,1497.88) 495.88,1497.88 v1(544,1546) 623,1546 ; 216.54,1840.54 v1(216.54,1968.5) ; v2@254.61,2413.39 262.49,2421.26 v2(267.21,2421.26) 275.59,2429.64 275.23,2430 349,2430 ; v1(395,2459.53) 395,2440.31 384.69,2430 ; v1(408,2065) 414,2071 566.8,2071 v1(610.24,2027.56) 614.64,2023.16 736.16,2023.16 798,2085 798,2155.51 807.09,2164.6 v1(807.09,2187.6) 794.69,2200 552,2200 487,2265 v1(487,2367) 572,2367 v2@618,2413 ; v1(452.76,1950.19) 452.76,1949.76 v1(409,1906) 279.04,1906 v1(216.54,1968.5) ; v1(502,2484) 502,2552 419,2635 v1(332,2635) 385.31,2581.68 355.31,2551.68 v1(355.31,2500) 335,2479.68 384.69,2430 ; v1(623,1704) 623,1546 ; v1(826.77,1496.06) 776.83,1546 623,1546 ; v1(216.54,1968.5) 216.54,2224.41 v1(177.17,2263.78) 303.12,2263.78 343,2303.66 343,2424 349,2430 ; 349,2430 384.69,2430
  Bot w6: J89.9 v2@254.61,2413.39 ; v1(177.17,2263.78) 177.17,2227.56 D87.3 ; v1(216.54,1968.5) 216.54,1983.66 238.78,2005.91 IC79.5 ; C304.1 307.46,1691.15 v1(308.07,1690.54) ; D88.2 324.56,2627.56 v1(332,2635) 363.5,2635 ; v1(345.28,1497.88) IC73.3 365.42,1541.34 374.02,1549.94 374.02,1634.2 LD26.1 ; IC72.3@353.82,2530 IC72.3 355.31,2525.59 v1(355.31,2500) ; 363.5,2430 365.47,2430 v1(395,2459.53) ; v1(408,2065) 408.23,2065.23 J91.6 ; v1(452.76,1950.19) 454.06,1951.5 C219.2 ; v1(487,2367) 487.6,2366.4 T28.2 ; v1(502,2484) 503,2485 D86.2 ; v1(544,1546) 544.72,1545.28 IC74.3 ; C192.1 604.33,2021.65 v1(610.24,2027.56) 630.91,2027.56 633.86,2024.61 C193.2 635.83,2021.65 655.06,2002.42 655.06,1970.29 651.57,1966.8 IC78.21 651.57,1848.43 v1(641.73,1838.58) 631.89,1828.74 IC78.5 631.89,1712.89 v1(623,1704) ; v2@618,2413 618.39,2413.39 J88.9 ; IC80.1 756.89,2200.2 769.49,2187.6 777.56,2187.6 ; v1(778.15,1625.2) TP22.1 ; v1(780.36,2048) 782.48,2045.88 IC80.7 ; IC80.2 782.48,2192.52 777.56,2187.6 ; IC80.3 v1@808.07,2187.6 ; IC77.3 817.72,1505.12 v1(826.77,1496.06) ; IC80.4 833.66,2191.53 829.73,2187.6 v1@808.07,2187.6 ; 777.56,2187.6 v1(807.09,2187.6) v1@808.07,2187.6
  other v1: 698.82,1781.49 588,1787.35 647,1787.35 697.64,1836.05 586.61,1837.62 587.56,1892.57 647,1892.57 697.64,1892.57
  other v2: 600.39,2411.42
GND_LED: C213.1 C214.1 C217.2 C218.2 C220.2 D75.2 D77.2 IC73.4 IC74.4 IC77.4 J86.1 LD25.1 R305.1 R310.1 R315.1 T20.1 T20.2 T20.3 T21.1 T21.2 T21.3 T22.1 T22.2 T22.3 | length 2544
  Top w6: v1(147.64,1220.47) 196.85,1171.26 v1(196.85,1161.42)
  Top w40: J86.1 104.33,575.33 150,621 150,917.72 v2(236.22,1003.94)
  Bot w6: LD25.1 106.3,1220.47 v1(147.64,1220.47) ; C220.2 355.12,1295.28 IC73.4 350.39,1280.31 R305.1 410.63,1223.23 414.57,1219.29 C213.1 ; C218.2 594.49,1362.2 581.5,1349.21 IC74.4 600.39,1289.37 633.86,1255.91 R310.1 654.72,1215.35 669.29,1200.79 669.29,1122.05 ; v2(767.72,1003.94) 838.58,1003.94 866.14,1031.5 866.14,1200.79 843.7,1223.23 R315.1 817.72,1228.35 IC77.4
  Bot w10: C217.2 v1(147.64,1090.55) ; 157.48,1122.05 163.39,1127.95 D75.2 192.91,1157.48 v1(196.85,1161.42) ; T20.1 188.78,1012.01 196.85,1003.94 ; 413.39,1122.05 414.57,1123.23 C213.1
  Bot w40: J86.1 104.33,361.67 148.69,317.31 148.69,173.31 176,146 326,146 336.61,156.61 D77.2
  other v2: 393.7,1003.94 629.92,1003.94
IO0: IC78.22
IO1: IC78.19
MODBUS_A: D87.1 IC79.6 J88.3 J89.3 JP5.2 | length 1380.8
  Top w10: J89.3 244.09,2492.13 v1(255.91,2480.31) ; v1(282,2294) 295,2307 v1(295,2377) ; v1(631,2491) 632.13,2492.13 J88.3
  Bot w6: v1(255.91,2480.31) 258.93,2480.31 308.84,2530.22 308.84,2533.25 334.65,2559.06 387.45,2559.06 415.02,2531.48 417.12,2531.48 421.13,2527.46 594.54,2527.46 v1(631,2491) ; 260,2101 260,2082.52 303.23,2039.29 IC79.6
  Bot w10: JP5.2@78.74,2206.3 100,2185.04 225,2185.04 ; v1@258.93,2480.31 275.59,2480.31 300.8,2455.1 300.8,2436.63 301.83,2435.6 301.83,2406.92 300.8,2405.89 300.8,2382.8 v1(295,2377) ; 260,2101 260,2117.72 225,2152.72 225,2185.04 ; v1(282,2294) 282,2290.86 270.28,2279.13 D87.1 234.84,2262.4 225,2252.56 225,2185.04
MODBUS_B: D87.2 IC79.7 J88.5 J89.5 R318.1 | length 1030.7
  Top w6: v1(670,2274) 670,2316 688.65,2334.65 J88.5
  Top w10: J89.5 157.83,2335 v1(265,2335)
  Bot w6: R318.1 307.09,2060.22 317.68,2060.22 326.36,2051.55 353.23,2051.55 IC79.7 ; 322.28,2257.28 338.28,2257.28 346.16,2265.16 390.72,2265.16 391.72,2266.16 454.06,2266.16 456.16,2264.06 577.36,2264.06 582.25,2259.16 617.75,2259.16 634.59,2276 636.43,2274.16 669.84,2274.16 v1(670,2274)
  Bot w10: v1(265,2335) 271.84,2328.16 281.14,2328.16 303.16,2306.14 303.16,2287.43 314.96,2275.62 314.96,2257.28 ; R318.1 307.09,2177.17 296.65,2187.6 D87.2 274.21,2191.53 274.21,2216.53 314.96,2257.28 ; 322.28,2257.28 314.96,2257.28
MODBUS_DE: IC78.11 IC79.3 | length 298.2
  Bot w6: IC79.3 303.23,1837.62 477.74,1837.62 479.32,1836.05 496.32,1836.05 523.31,1809.06 IC78.11
MODBUS_DI: IC78.31 IC79.4 | length 746.1
  Top w6: v1(492.12,1860.23) 492.12,1847.92 509.34,1830.71 566.88,1830.71 578.81,1818.78 632.97,1818.78 633.89,1817.85 634.22,1818.19 659.78,1818.19 660.76,1817.2 746.62,1817.2 760.13,1830.71 777.56,1830.71 v1(787.4,1840.55)
  Bot w6: IC79.4@253.23,1774.33 IC79.4 253.23,1841.65 271.81,1860.23 v1(492.12,1860.23) ; IC78.31 760.63,1789.37 761.47,1790.21 780.84,1790.21 791.87,1801.25 791.87,1816.86 784.8,1823.93 787.4,1826.52 v1(787.4,1840.55)
MODBUS_R_En: IC78.2 IC79.2 | length 628
  Top w6: v1(498.75,1780.2) 498.75,1778.81 521.14,1756.42 v1(521.14,1682.62)
  Bot w6: IC79.2 353.23,1773.97 373.4,1753.8 471.76,1753.8 498.16,1780.2 v1(498.75,1780.2) ; v1(521.14,1682.62) 534.92,1668.84 544.61,1668.84 552.13,1661.32 552.13,1620.01 562.37,1609.77 600.06,1609.77 605.05,1604.78 638.93,1604.78 654,1619.85 654,1660.24 655.19,1661.42 661.8,1661.42 690.94,1690.56 IC78.2
MODBUS_RO: IC78.30 R319.1 | length 353.4
  Top w6: v1(488.52,1817.2) 499.53,1806.19 628.59,1806.19 629.57,1805.2 638.21,1805.2 639.2,1806.19 654.8,1806.19 655.79,1805.2 769.18,1805.2 v1(773.03,1809.06)
  Bot w6: R319.1 v1(488.52,1817.2) ; IC78.30 v1(773.03,1809.06)
NetC193_1: C193.1 IC78.20 | length 52
  Bot w10: IC78.20 631.89,1984.25 C193.1
NetC304_2: C304.2 IC78.8 Q10.1 | length 688.8
  Bot w6: Q10.1 112.2,1754.33 139.95,1726.58 C304.2 253.66,1717.02 394.87,1717.02 400.61,1711.28 437.27,1711.28 444.95,1703.59 469.03,1703.59 475.16,1709.72 504.62,1709.72 508.37,1713.46 514.7,1713.46 543.36,1742.13 IC78.8
NetC305_2: C305.2 IC78.7 Q10.2 | length 566.6
  Bot w6: Q10.2 165.27,1571.53 246.17,1652.43 296.61,1652.43 343.46,1699.28 432.29,1699.28 439.98,1691.59 474.01,1691.59 477.69,1695.28 507.15,1695.28 513.34,1701.46 567.17,1701.46 589.11,1723.4 589.54,1723.4 592.52,1726.38 IC78.7
NetD75_1: D75.1 R301.2 R302.2 T19.1 | length 349.1
  Bot w10: T19.1 86.3,937.01 86.46,937.17 ; D75.1 72.83,1125.79 86.61,1112.01 86.61,1023.62 86.46,1023.46 86.46,937.17 ; R302.2 R301.2 79.92,914.57 86.61,921.26 86.61,937.01 86.46,937.17
NetD86_1: D86.1 R321.2 T28.3 | length 234.9
  Top w6: v1(516,2571) 578.38,2508.62 v1(582,2508.62)
  Bot w6: v1(516,2571) R321.2 ; v1(582,2508.62) 587.56,2503.06 D86.1
  Bot w15: T28.3 525,2422.44 D86.1
NetIC73_1: IC73.1 R303.2 | length 77.9
  Bot w10: IC73.1 245.28,1590.83 R303.2
NetIC73_5: IC73.5 R304.1 R305.2 | length 147.7
  Bot w6: IC73.5 295.28,1224.41 R304.1 317.72,1186.22 R305.2
NetIC74_1: IC74.1 R306.2 | length 78.5
  Bot w6: R306.2 437.65,1535.43 471.65,1535.43 IC74.1
NetIC74_5: IC74.5 R308.1 R310.2 | length 172.6
  Bot w6: R308.1 576.77,1204.72 603.15,1178.35 R310.2
  Bot w15: IC74.5 531.5,1248.03 R308.1
NetIC77_1: IC77.1 R313.2 | length 122.6
  Bot w6: R313.2 671.26,1484.25 689.17,1502.17 689.17,1549.21 IC77.1
NetIC77_5: IC77.5 R314.1 R315.2 | length 146.8
  Bot w6: IC77.5 767.72,1212.6 R314.1 794.09,1186.22 R315.2
NetIC78_32: IC78.32 R317.1 | length 374.9
  Bot w6: R317.1 529.46,1623.66 555.35,1597.77 595.09,1597.77 600.08,1592.78 643.9,1592.78 666,1614.88 666,1640.48 709.68,1684.16 722.8,1684.16 733.84,1695.2 733.84,1765.34 IC78.32
NetIC79_1: IC79.1 R319.2 | length 74.3
  Bot w6: IC79.1@403.23,1798.63 IC79.1@403.3,1798.7 ; IC79.1@403.3,1793.38 IC79.1@403.3,1798.7 ; R319.2 441.73,1780.2 429.11,1792.81 429.11,1797.4 404.6,1797.4 IC79.1@403.3,1798.7
NetJ88_4: J88.4 J89.4 | length 733.7
  Top w6: J89.4 216.61,2413.39 v1(248,2382) ; v1(630,2363) 630,2396 647.39,2413.39 J88.4
  Bot w6: v1(248,2382) 262.2,2382 286.04,2358.16 287.91,2358.16 337.16,2308.91 337.16,2307.22 355.22,2289.16 380.78,2289.16 381.78,2290.16 464,2290.16 466.1,2288.06 587.3,2288.06 592.2,2283.16 607.8,2283.16 619.16,2294.51 619.16,2315.16 630,2326 v1(630,2363)
NetJ88_6: J88.6 J89.6 | length 603.7
  Bot w15: J89.6 218.61,2649.61 258.19,2689.19 459.49,2689.19 461.67,2687 631,2687 668.39,2649.61 J88.6
NetJ88_7: J88.7 R321.1 | length 154.4
  Bot w15: R321.1@575,2573.5 725.71,2573.5 J88.7
NetJ88_8: J88.8 J89.8 | length 643.7
  Bot w6: J89.8 241.07,2492.13 273.1,2524.16 285.8,2524.16 296.84,2535.2 296.84,2547.9 320,2571.06 392.42,2571.06 420,2543.48 422.09,2543.48 426.1,2539.46 625.54,2539.46 672.87,2492.13 J88.8
NetJ88_10: J88.10 J89.10 | length 651.8
  Bot w6: J89.10 244.85,2334.65 246.16,2335.96 246.16,2342.8 257.2,2353.84 272.8,2353.84 280.63,2346.01 283.08,2346.01 325.16,2303.94 325.16,2302.25 350.25,2277.16 385.75,2277.16 386.75,2278.16 459.03,2278.16 461.13,2276.06 582.33,2276.06 587.22,2271.16 612.78,2271.16 631.16,2289.54 631.16,2300.8 665,2334.65 J88.10
NetJP5_1: JP5.1 R318.2 | length 115.7
  Bot w10: JP5.1@78.74,2106.3 82.44,2110 R318.2
NetLD25_2: LD25.2 R270.1 | length 127.2
  Bot w10: LD25.2@79.92,1388.58 LD25.2 174.41,1370.08 R270.1@192.13,1387.8
NetLD26_2: LD26.2 R317.2 | length 45.6
  Bot w10: LD26.2 488.52,1643.7 R317.2
NetR270_2: R270.2 R331.1 | length 83.7
  Bot w6: R270.2 192.07,1315.8 198.82,1309.06 198.82,1268.5 R331.1
NetR304_2: R304.2 T20.4 | length 113
  Bot w10: R304.2 289.37,1153.54 338.78,1104.13 T20.4
NetR308_2: R308.2 T21.4 | length 80.5
  Bot w10: R308.2 578.94,1137.6 T21.4
NetR314_2: R314.2 T22.4 | length 100.7
  Bot w10: R314.2 815.16,1102.17 T22.4
P3V3: C192.2 C216.2 IC72.2 IC78.4 IC78.18 IC80.8 J91.2 R312.1 R320.2 R384.1 R388.1 TP21.1 | length 2272.4
  Top w15: v1(395,2321) 403,2313 v1(403,2247) ; v1(651.57,1706.85) 668.87,1706.85 700.36,1738.34 729.96,1738.34 743.84,1724.46 769.54,1724.46 v1@771.61,1722.39
  Bot w6: R388.1@566.89,1625.2 R388.1@575.42,1625.2 ; 593.53,1633.07 593.53,1651.84 596.62,1654.93 596.62,1672.18 607.07,1682.62 628.27,1682.62 651.57,1705.93 v1(651.57,1706.85) 652.81,1708.09 652.81,1740.89 IC78.4 ; 594.54,1627.07 596.41,1625.2 613.16,1625.2 R384.1